# Altium PCB OLED_PCB_Dual_Rev1_1.PcbDoc
Units mil, origin at the board's own origin, x right, y up, seen from the top; angles counter-clockwise.
Board outline 1000 x 871 mil, 2 copper layers (Top Layer, Bottom Layer); 21 components, 17 nets, 81 pads, 11 vias.
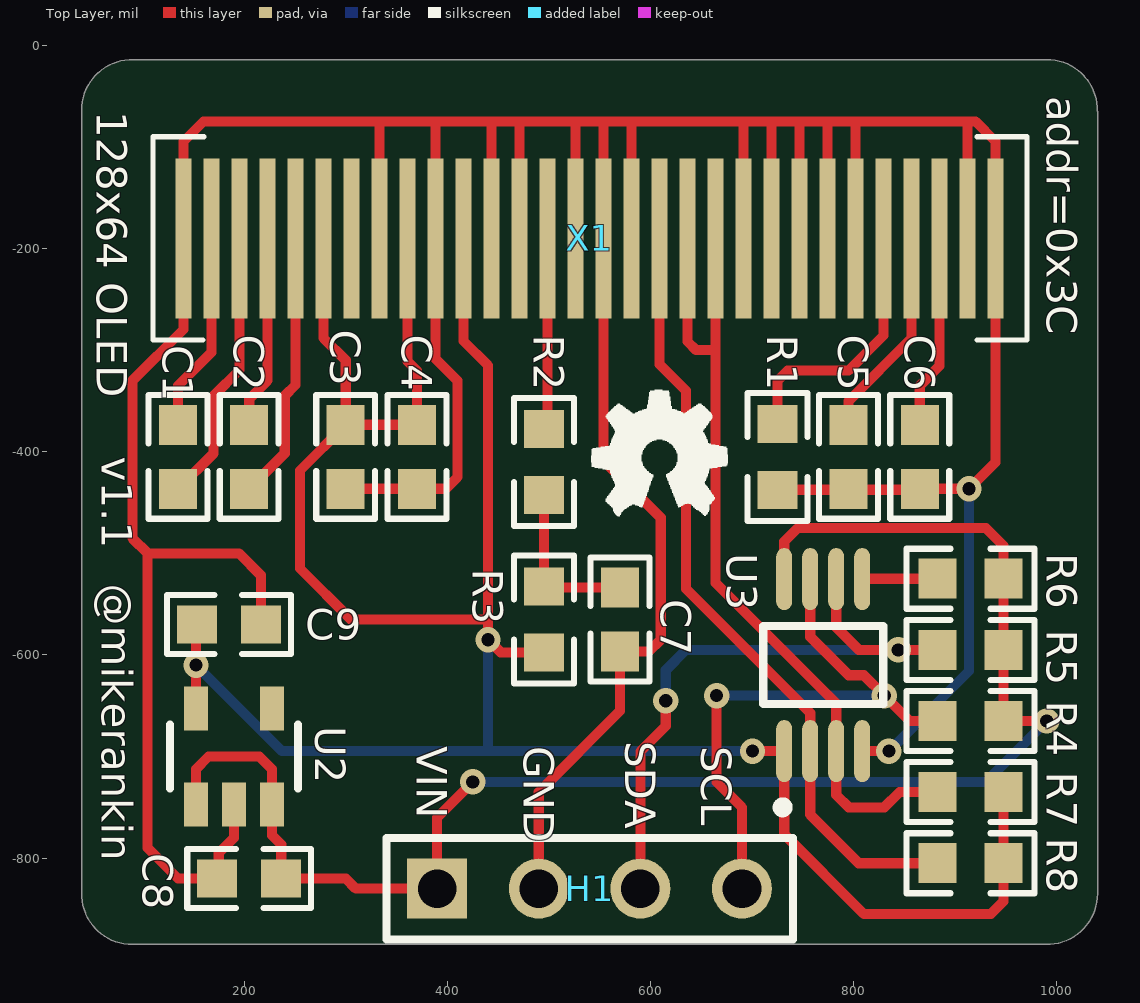
[diagram p0: Top Layer view]
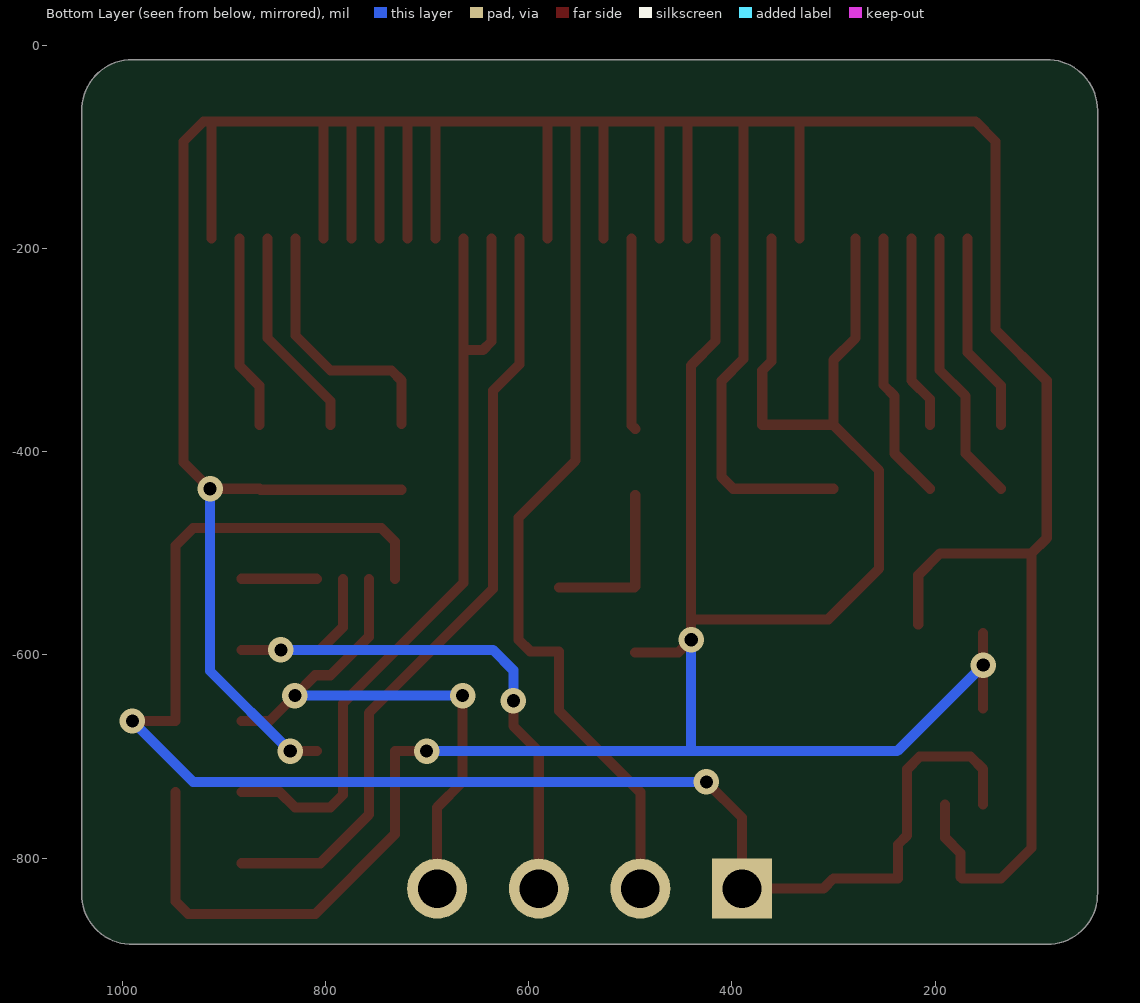
[diagram p1: Bottom Layer view, seen from below]
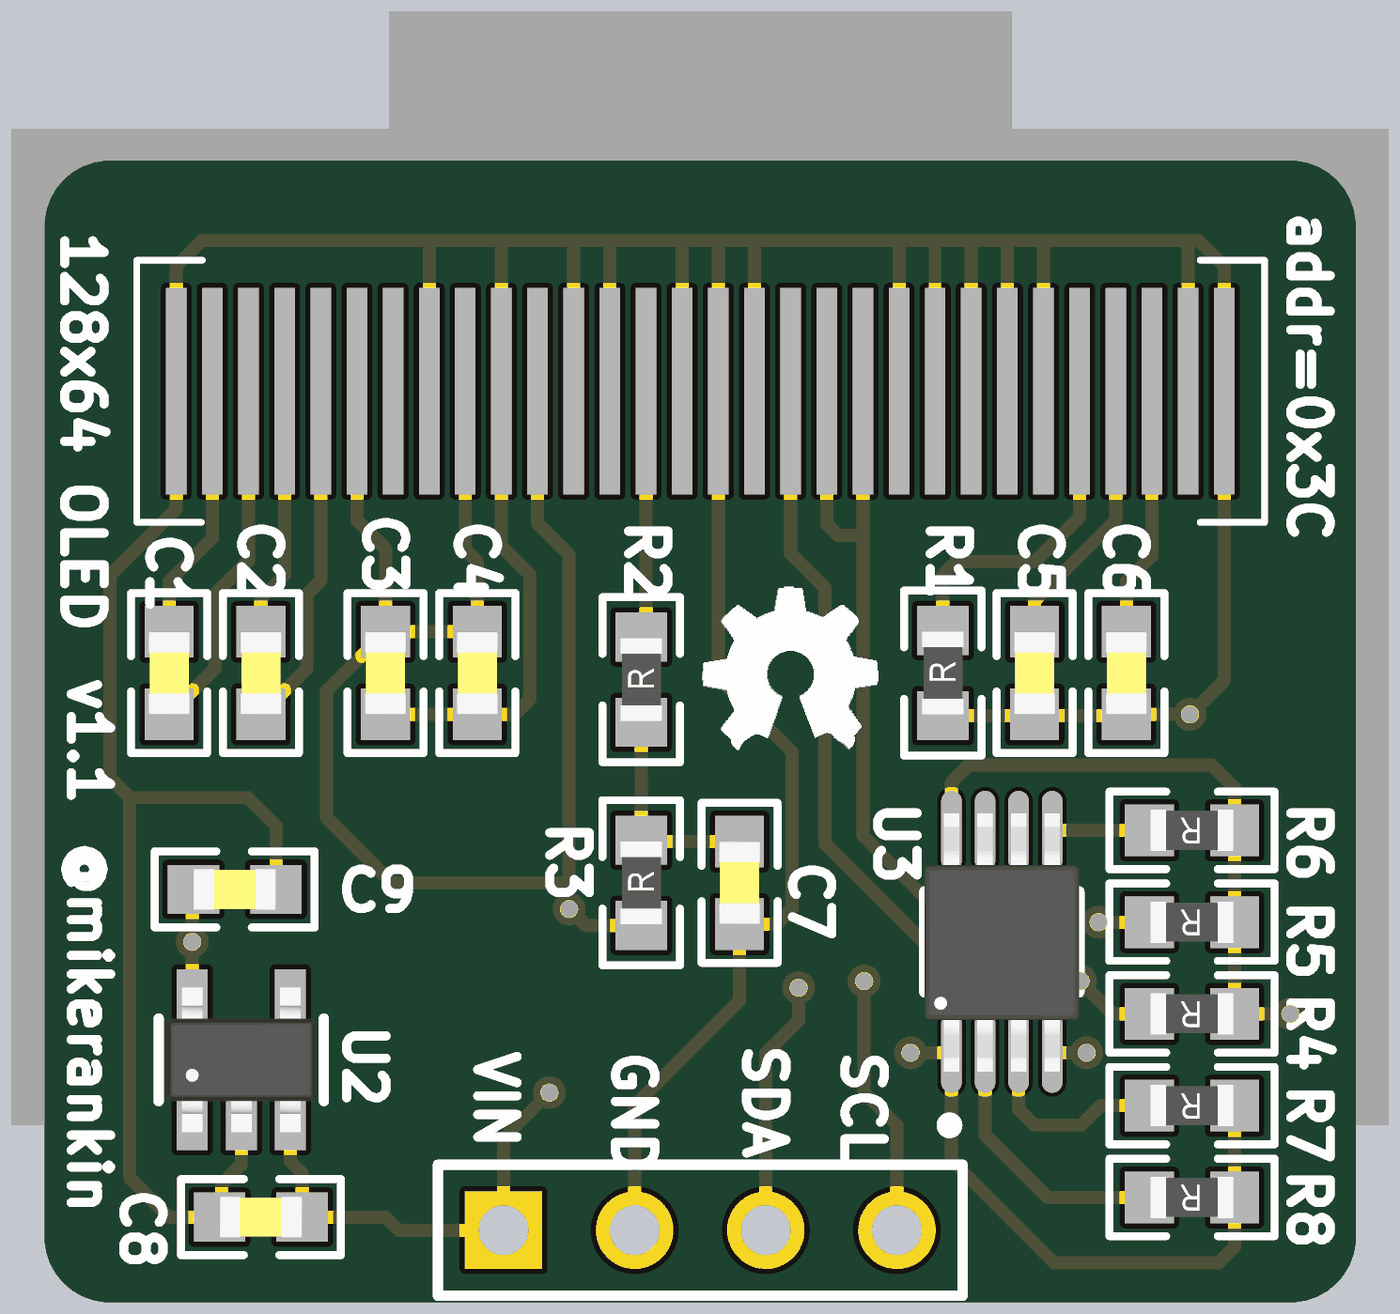
[diagram p2: 3D render of the assembled board from above, using the file's embedded part models]

## Layer stack, top to bottom
Top Layer: signal copper 1.4
Dielectric: dielectric 12.6, FR-4, Dk 4.8
Bottom Layer: signal copper 1.4

## Board outline
40.01,-834 ccw(c90,-835) 90,-885 989,-885 989,-884.99 ccw(c990,-835) 1040,-835 1040,-65 1039.88,-65 ccw(c989.89,-64) 989.89,-14 91,-14 91,-14.01 ccw(c90,-64) 40,-64

## Design rules (kind name [scope] priority, off if disabled: settings)
Clearance [All] p1: gap=10
MinimumSolderMaskSliver [All] p1: minsoldermaskwidth=3
PolygonConnect [All] p1: connectstyle=Relief reliefconductorwidth=10 reliefentries=4 polygonreliefangle="90 Angle" airgapwidth=10
RoutingVias [All] p1: holewidth=28 width=50 viastyle="Through Hole" minholewidth=28 minwidth=50 maxholewidth=28 maxwidth=50
SilkToSilkClearance [All] p1: silktosilkclearance=5
SilkToSolderMaskClearance [IsPad] p1: minsilkscreentomaskgap=5 clearancetoexposedcopper=TRUE
SolderMaskExpansion [All] p1: expansion=4
Width [All] p1: maxlimit=10 minlimit=10 preferedwidth=10
25 further rules are at their usual default settings.

## Components (designator, comment, footprint, x,y, rotation, side; value= is the part's Value field where it differs from the comment)
C1 "1uF" CAPC1608X90N 135,-405 r90 top
C2 "1uF" CAPC1608X90N 205,-405 r90 top
C3 "1uF" CAPC1608X90N 300,-405 r90 top
C4 "1uF" CAPC1608X90N 370,-405 r90 top
C5 "4.7uF" CAPC1608X90N 795,-405 r90 top
C6 "2.2uF" CAPC1608X90N 865,-405 r90 top
C7 "0.1uF" CAPC1608X90N 570,-565 r90 top
C8 "0.1uF" CAPC1608X90N 205,-820 r180 top
C9 "1uF, 10V" CAPC1608X90N 185,-570 r0 top
H1 "CON4" HDR1X4-Empty 540,-830 r0 top
R1 "390K" RESC1608X55N 725,-405 r90 top
R2 "10K" RESC1608X55N 495,-410 r90 top
R3 "10K" RESC1608X55N 495,-565 r90 top
R4 "10K" RESC1608X55N 915,-665 r180 top
R5 "10K" RESC1608X55N 915,-595 r180 top
R6 "10K" RESC1608X55N 915,-525 r180 top
R7 "10K" RESC1608X55N 915,-735 r180 top
R8 "10K" RESC1608X55N 915,-805 r180 top
U2 "LP2985-33DBVR" SOT95P280X144-5N 190,-700 r90 top
U3 "PCA9517ADP,118" TSOP65P490X110-8N 770,-610 r90 top
X1 "OLED_GLASS" OLED_GLASS 540,-190 r0 bottom

## Footprints (in the part's own frame and the unit in brackets; to place one, negate y for a bottom-side part, rotate by r counter-clockwise, add the part's x,y. Pads: shape width x height; smd on the part's side, far side on the other; paste and mask are expansions set on the pad)
CAPC1608X90N [mm] "Chip Capacitor, 2-Leads, Body 1.6x0.8mm, IPC Medium Density (0603)"
  rect 1x0.95 smd: 1(-0.8,0) 2(0.8,0)
  silkscreen extent -1.55,-0.74 1.55,0.74, body extent -0.8,-0.4 0.8,0.4, height 0.79
HDR1X4-Empty [mm]
  rect 1.5x1.5 hole 0.965: 1(-3.81,0)
  round 1.5 hole 0.965: 2(-1.27,0) 3(1.27,0) 4(3.81,0)
  silkscreen extent -5.08,-1.27 5.08,1.27
OLED_GLASS [mm] "OLED_GLASS"
  rect 0.4x4 smd far side: 1(-10.15,0) 2(-9.45,0) 3(-8.75,0) 4(-8.05,0) 5(-7.35,0) 6(-6.65,0) 7(-5.95,0) 8(-5.25,0) 9(-4.55,0) 10(-3.85,0) 11(-3.15,0) 12(-2.45,0) 13(-1.75,0) 14(-1.05,0) 15(-0.35,0) 16(0.35,0) 17(1.05,0) 18(1.75,0) 19(2.45,0) 20(3.15,0) 21(3.85,0) 22(4.55,0) 23(5.25,0) 24(5.95,0) 25(6.65,0) 26(7.35,0) 27(8.05,0) 28(8.75,0) 29(9.45,0) 30(10.15,0)
  body extent -13.33,-7.37 13.34,14.22, height 3.33
RESC1608X55N [mm] "Chip Resistor, 2-Leads, Body 1.6x0.8mm, IPC Medium Density (0603 med)"
  rect 0.95x1 smd: 1(-0.825,0) 2(0.825,0)
  silkscreen extent -1.6,-0.75 1.6,0.75, body extent -0.8,-0.4 0.8,0.4, height 0.54
SOT95P280X144-5N [mm] "SOT23, 5-Leads, Body 3.1x3.0mm (max), Pitch 0.95mm, IPC Medium Density (RFMD SOT23-5)"
  rect 1.1x0.6 smd: 1(-1.2,0.95) 2(-1.2,0) 3(-1.2,-0.95) 4(1.2,-0.95) 5(1.2,0.95)
  silkscreen extent -0.8,-1.6 0.8,1.6, body extent -1.4,-1.45 1.4,1.45, height 1.45
TSOP65P490X110-8N [mm] "TSOP, 8-Leads, Body 3.0x3.0mm (max), Pitch 0.65mm, IPC Medium Density"
  oval 1.55x0.4 smd mask+0.076: 1(-2.15,0.975) 2(-2.15,0.325) 3(-2.15,-0.325) 4(-2.15,-0.975) 5(2.15,-0.975) 6(2.15,-0.325) 7(2.15,0.325) 8(2.15,0.975)
  silkscreen extent -3.68,-1.5 0.97,1.5, body extent -2.51,-1.5 2.49,1.5, height 1.1

## Part data
C1 C2 C3 C4 C5 C6 C7 C8: library part CAP_0603, "CAP 0603"
C9: library part C1608X7R1A105K, "CAP CER 1UF 10V 10% X7R 0603"
H1: "CONN HEADER 4POS .100\" PADS"
R1 R2 R3 R4 R5 R6 R7 R8: library part RES_0603, "RES 0603"
U2: "IC REG LDO 3.3V .15A SOT23-5"
U3: "IC I2C BUS REPEATER 8-TSSOP"

## Via types
v1: diameter 25, hole 13, Top Layer to Bottom Layer, tented both sides, 11 vias

## Nets (pads, with @x,y where several pads share a name; then routed paths per layer and width w, separated by ;. In a path a pad name is that pad's centre, name@x,y a point inside that pad or via, vN(x,y) a via of type N, cw(c..) or ccw(c..) an arc to the next point about the centre after c; other vN are vias at no path point)
+3.3V: C3.2 C4.2 C9.1 R3.1 R7.1 R8.1 U2.5 U3.1 X1.6 X1.9 X1.11 | length 2521.9
  Top Layer w10: U2.5 v1(152.6,-610) C9.1@152.6,-578.4 ; X1.6 278.19,-288.19 300,-310 C3.2 ; X1.9 360.87,-310.87 370,-320 C4.2 C3.2 ; X1.11 415.98,-290.98 440,-315 440,-565 ; R3.1 452.48,-597.48 v1(440,-585) 440,-565 ; v1(700.35,-694.65) U3.1 731.61,-776.61 810,-855 935,-855 947.48,-842.52 R8.1 R7.1 ; C3.2 255,-418.5 255,-515 305,-565 440,-565
  Bottom Layer w10: v1(152.6,-610) 237.24,-694.65 440,-694.65 ; v1(440,-585) 440,-694.65 ; v1(700.35,-694.65) 440,-694.65
GND: C3.1 C4.1 C5.1 C6.1 C7.1 C8.2 C9.2 H1.2 R1.1 U2.2 U3.4 X1.1 X1.8 X1.10 X1.12 X1.13 X1.15 X1.16 X1.17 X1.21 X1.22 X1.23 X1.24 X1.25 X1.29 X1.30 | length 5309.4
  Top Layer w10: U2.2 190,-780 175,-795 175,-818.5 C8.2 135,-820 105,-790 105,-500 ; C9.2 216.5,-521.5 195,-500 105,-500 ; C3.1 C4.1 398.5,-436.5 410,-425 410,-330 388.43,-308.43 X1.10 388.43,-75 ; X1.8 333.31,-75 ; X1.12 443.54,-75 ; X1.13 471.1,-75 ; H1.2 490,-735 570,-655 C7.1 598.5,-596.5 610,-585 610,-465 553.78,-408.78 X1.16 553.78,-75 ; X1.15 526.22,-75 ; X1.17 581.34,-75 ; X1.21 691.57,-75 ; X1.22 719.13,-75 ; R1.1 864.02,-437.48 C6.1 v1(913.5,-436.5) 939.61,-410.39 X1.30 939.61,-94.61 920,-75 912.05,-75 ; X1.23 746.69,-75 ; X1.24 774.25,-75 ; X1.25 801.81,-75 ; U3.4 v1(834.65,-694.65) ; X1.29 912.05,-75 ; 105,-500 90,-485 90,-330 140.39,-279.61 X1.1 140.39,-94.61 160,-75 333.31,-75 ; 333.31,-75 388.43,-75 ; 388.43,-75 443.54,-75 ; 443.54,-75 471.1,-75 ; 471.1,-75 526.22,-75 ; 526.22,-75 553.78,-75 ; 553.78,-75 581.34,-75 ; 581.34,-75 691.57,-75 ; 691.57,-75 719.13,-75 ; 719.13,-75 746.69,-75 ; 746.69,-75 774.25,-75 ; 774.25,-75 801.81,-75 ; 801.81,-75 912.05,-75
  Bottom Layer w10: v1(834.65,-694.65) 913.5,-615.79 v1(913.5,-436.5)
NetC1_1: C1.1 X1.3 | length 271.6
  Top Layer w10: C1.1 170,-401.5 170,-345 195.51,-319.49 X1.3
NetC1_2: C1.2 X1.2 | length 197.2
  Top Layer w10: C1.2 135,-335 167.95,-302.05 X1.2
NetC2_1: C2.1 X1.5 | length 265.4
  Top Layer w10: C2.1 240,-401.5 240,-345 250.63,-334.37 X1.5
NetC2_2: C2.2 X1.4 | length 191
  Top Layer w10: C2.2 205,-348.07 223.07,-330 X1.4
NetC5_2: C5.2 X1.27 | length 209.2
  Top Layer w10: C5.2 795,-350 856.93,-288.07 X1.27
NetC6_2: C6.2 X1.28 | length 191.6
  Top Layer w10: C6.2 865,-335 884.49,-315.51 X1.28
NetC7_2: C7.2 R2.1 R3.2 | length 165.4
  Top Layer w10: R2.1 R3.2 495.98,-533.5 C7.2
NetH1_3: H1.3 R5.2 U3.6 | length 618.8
  Top Layer w10: H1.3 590,-695 615,-670 v1(615,-645) ; U3.6 782.8,-572.8 805,-595 v1(843.76,-595) R5.2
  Bottom Layer w10: v1(615,-645) 615,-615 635,-595 v1(843.76,-595)
NetH1_4: H1.4 R4.2 U3.7 | length 581.8
  Top Layer w10: v1(665,-640) 665,-725 690,-750 H1.4 ; U3.7 757.2,-582.2 795,-620 810,-620 v1(830,-640) 855,-665 R4.2
  Bottom Layer w10: v1(665,-640) v1(830,-640)
NetR1_2: R1.2 X1.26 | length 260.9
  Top Layer w10: R1.2 725,-330 735,-320 795,-320 829.37,-285.63 X1.26
NetR2_2: R2.2 X1.14 | length 189
  Top Layer w10: R2.2 498.66,-373.86 X1.14
NetR6_2: R6.2 U3.5 | length 74.3
  Top Layer w10: U3.5 808.74,-525 R6.2
NetR7_2: R7.2 U3.3 X1.19 X1.20 | length 840.5
  Top Layer w10: X1.19 636.46,-291.46 645,-300 664.02,-300 ; X1.20 664.02,-300 ; R7.2 845,-735 830,-750 795,-750 782.8,-737.8 U3.3 782.8,-647.8 664.02,-529.02 664.02,-300
NetR8_2: R8.2 U3.2 X1.18 | length 773.7
  Top Layer w10: X1.18 608.9,-313.9 635,-340 635,-535 757.2,-657.2 U3.2 757.2,-757.2 780,-780 805,-805 R8.2
VIN: C8.1 H1.1 R4.1 R5.1 R6.1 U2.1 U2.3 U3.8 | length 1578.9
  Top Layer w10: U2.1 152.6,-712.4 165,-700 215,-700 227.4,-712.4 U2.3 227.4,-777.4 236.5,-786.5 C8.1 300,-820 310,-830 H1.1 390,-760 v1(425,-725) ; U3.8 731.61,-488.39 745,-475 930,-475 947.48,-492.48 R6.1 R5.1 R4.1 v1(990,-665)
  Bottom Layer w10: v1(425,-725) 930,-725 v1(990,-665)
pads on no net: U2.4 X1.7

## Silkscreen, mask and mechanical layers (free items; w line width, h text height)
Top Overlay:
  region: 697 vertices and 0 holes, not listed, extent 541.51,-463.56 676.1,-339.15
  text "addr=0x3C" at 990,-50 h30 r270
  text "128x64 OLED" at 55,-65 h30 r270
  text "v1.1" at 60,-405 h30 r270
  text "@mikerankin" at 60,-530 h30 r270
  text "SDA" at 575,-685 h30 r270
  text "VIN" at 370,-690 h30 r270
  text "GND" at 475,-690 h30 r270
  text "SCL" at 650,-690 h30 r270
Mechanical 1:
  lines w10: 1039.88,-65 ccw(c989.89,-64) 989.89,-14 965,-14 91,-14 ccw(c90,-64) 40,-64 40,-834 ccw(c90,-835) 90,-885 989,-885 ccw(c990,-835) 1040,-835 1040,-65